# Altium PCB USB_receiver.PcbDoc
Units mm, origin at the board's own origin, x right, y up, seen from the top; angles counter-clockwise.
Board outline 18 x 44 mm, 2 copper layers (Top Layer, Bottom Layer); 49 components, 41 nets, 202 pads, 278 vias.
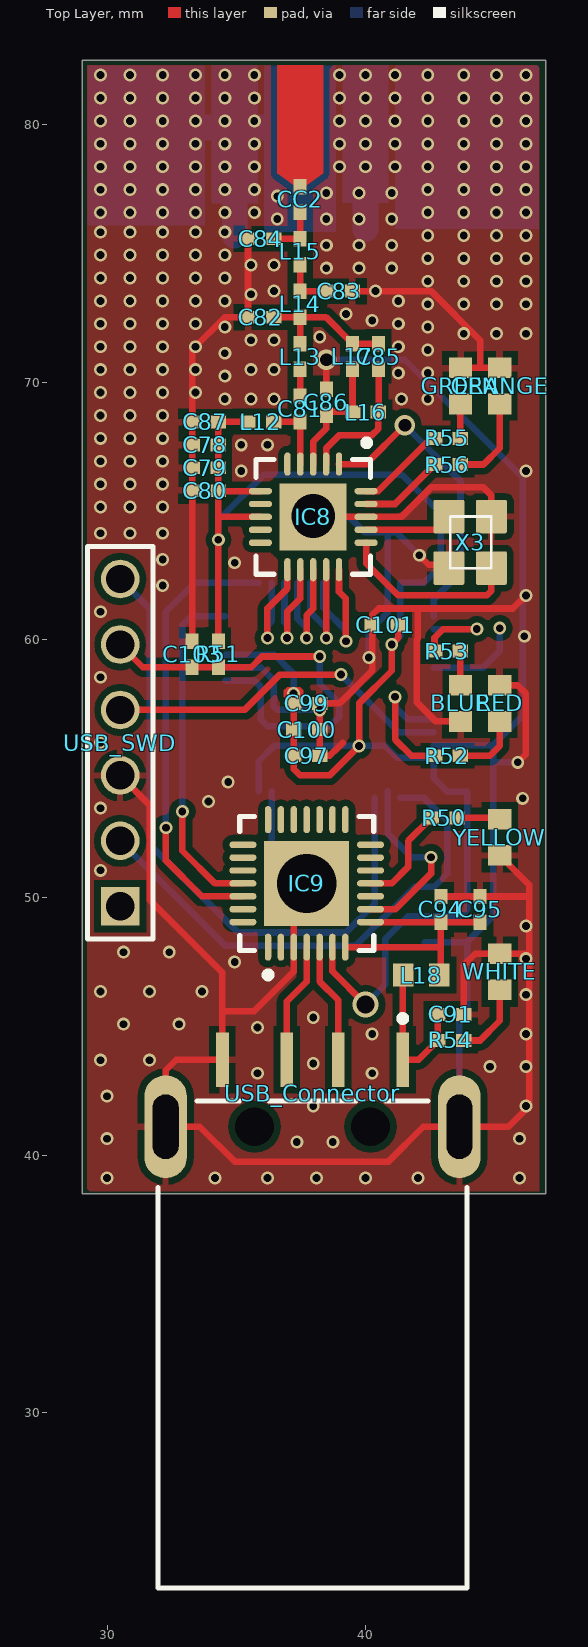
[diagram p0: Top Layer view]
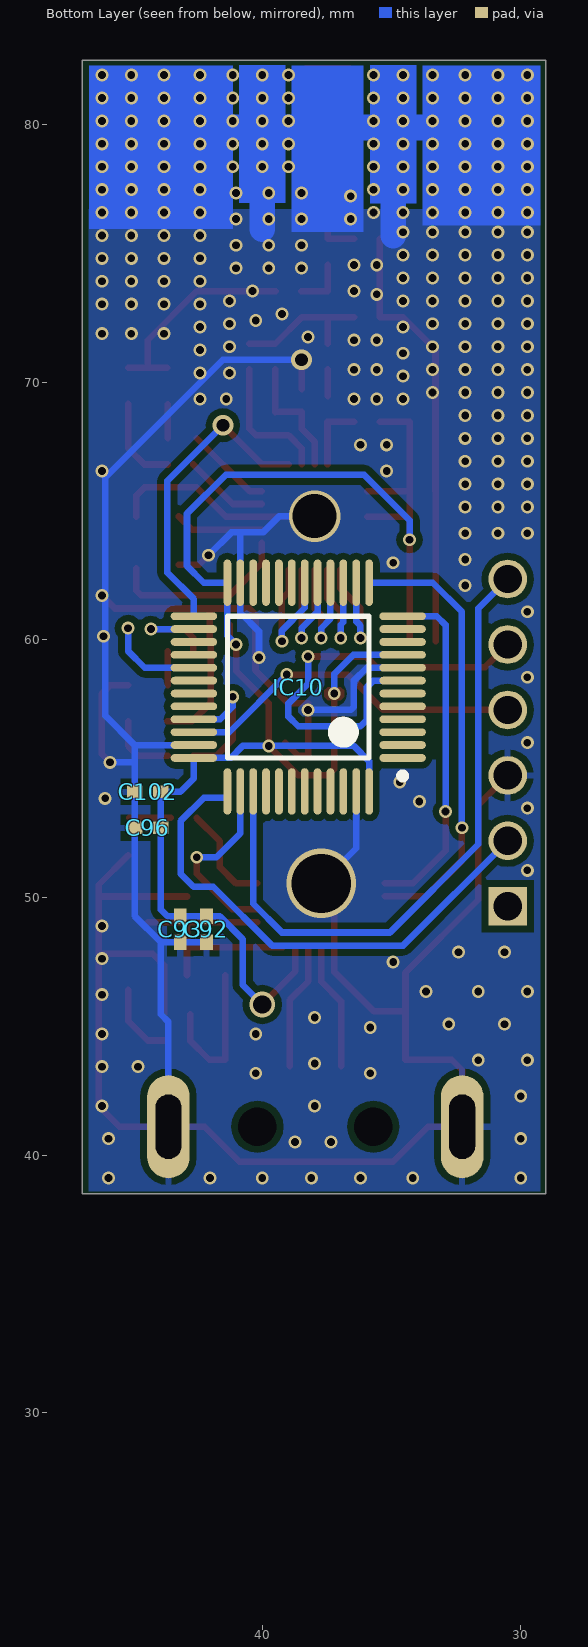
[diagram p1: Bottom Layer view, seen from below]

## Layer stack, top to bottom
Top Solder: solder mask 0.0102, Solder Resist, Dk 3.5
Top Layer: signal copper 0.0356
Dielectric 1: dielectric 0.32, FR-4, Dk 4.8
Bottom Layer: signal copper 0.0356
Bottom Solder: solder mask 0.0102, Solder Resist, Dk 3.5

## Board outline
29,38.5 29,82.5 47,82.5 47,38.5

## Design rules (kind name [scope] priority, off if disabled: settings)
Clearance [All] p1: gap=0.2
PlaneClearance [All] p1: clearance=0.254
PlaneConnect PlaneConnect_1 [All] p1: planeconnectstyle=Relief reliefexpansion=0.508 reliefentries=4 reliefconductorwidth=0.254 reliefairgap=0.254
PolygonConnect [IsVia AND InNet('GND2')] p1: connectstyle=Direct reliefconductorwidth=0.254 reliefentries=4 polygonreliefangle="90 Angle" airgapwidth=0.254
PolygonConnect PolygonConnect_1 [All] p2: connectstyle=Relief reliefconductorwidth=0.254 reliefentries=4 polygonreliefangle="90 Angle" airgapwidth=0.254
RoutingVias [All] p1: holewidth=0.711 width=1.27 viastyle="Through Hole" minholewidth=0.711 minwidth=1.27 maxholewidth=0.711 maxwidth=1.27
SolderMaskExpansion [All] p1: expansion=0.102
Width [All] p1: maxlimit=2 minlimit=0.254 preferedwidth=0.254 minimp=50.000000 maximp=50.000000 favimp=50.000000
28 further rules are at their usual default settings.

## Components (designator, comment, footprint, x,y, rotation, side; value= is the part's Value field where it differs from the comment)
BLUE "RED" 1608[0603] 43.688,57.531 r270 top
C78 "Cap" 0402 33.782,67.564 r0 top
C79 "Cap" 0402 33.782,66.675 r0 top
C80 "Cap" 0402 33.782,65.786 r0 top
C81 "Cap" 0402 37.465,68.961 r90 top
C82 "Cap" 0402 35.941,72.517 r180 top
C83 "Cap" 0402 38.989,73.533 r0 top
C84 "Cap" 0402 35.941,75.565 r180 top
C85 "Cap" 0402 40.513,70.993 r270 top
C86 "Cap" 0402 38.481,69.215 r270 top
C87 "Cap" 0402 33.782,68.453 r0 top
C91 "Cap" 0402 43.307,45.466 r180 top
C92 "Cap" 0402 42.172,48.768 r270 bottom
C93 "Cap" 0402 43.188,48.768 r270 bottom
C94 "Cap" 0402 42.926,49.538 r270 top
C95 "Cap" 0402 44.45,49.538 r270 top
C96 "Cap" 0402 44.45,52.705 r0 bottom
C97 "Cap" 0402 37.719,55.499 r0 top
C99 "Cap" 0402 37.719,57.531 r0 top
C100 "Cap" 0402 37.719,56.515 r0 top
C101 "Cap" 0402 40.767,60.579 r180 top
C102 "Cap" 0402 44.45,54.102 r0 bottom
C103 "Cap" 0402 33.274,59.436 r270 top
CC2 "Cap" 0402 37.465,77.089 r270 top
GREEN "RED" 1608[0603] 43.688,69.85 r90 top
IC8 "Si4461" QFN20_thermal_pad 1304.036,-1199.388 r270 top
IC9 "CP2102" RHD28_M 37.719,50.546 r90 top
IC10 "STM32F103_48pin" LQFP48 1294.892,-1202.309 r0 bottom
L12 "Inductor" 0402 35.941,68.453 r0 top
L13 "Inductor" 0402 37.465,70.993 r270 top
L14 "Inductor" 0402 37.465,73.025 r270 top
L15 "Inductor" 0402 37.465,75.057 r270 top
L16 "Inductor" 0402 40.005,68.834 r180 top
L17 "Inductor" 0402 39.497,70.993 r270 top
L18 "Ferrit bead" 1608[0603] 42.164,46.99 r180 top
ORANGE "RED" 1608[0603] 45.212,69.85 r90 top
R50 "Res1" 0402 43.053,53.086 r180 top
R51 "Res1" 0402 34.29,59.436 r270 top
R52 "Res1" 0402 43.18,55.499 r180 top
R53 "Res1" 0402 43.18,59.563 r180 top
R54 "Res1" 0402 43.307,44.45 r180 top
R55 "Res1" 0402 43.18,67.818 r180 top
R56 "Res1" 0402 43.18,66.802 r180 top
RED "RED" 1608[0603] 45.212,57.531 r90 top
USB_Connector "USB csatlakozó APA" USB_APA_SMD 1295.654,-1214.374 r270 top
USB_SWD "Tüskesor" HDR1X6 30.48,49.657 r90 top
WHITE "RED" 1608[0603] 45.212,47.117 r90 top
X3 "30 MHz" crystal_sx2520 1307.592,1328.801 r0 top
YELLOW "RED" 1608[0603] 45.212,52.332 r270 top

## Footprints (in the part's own frame and the unit in brackets; to place one, negate y for a bottom-side part, rotate by r counter-clockwise, add the part's x,y. Pads: shape width x height; smd on the part's side, far side on the other; paste and mask are expansions set on the pad)
0402 [mm] "Chip Capacitor, Body 1.0x0.5mm, IPC High Density"
  rect 0.6x0.5 smd: 1(-0.5,0) 2(0.5,0)
  body extent -0.55,-0.3 0.55,0.3, height 1.3
1608[0603] [mm] "Chip Capacitor, Body 1.6x0.8mm, IPC High Density"
  rect 0.8x0.9 smd: 1(-0.7,0) 2(0.7,0)
  body extent -0.87,-0.48 0.87,0.48, height 1.3
crystal_sx2520 [mm] "4_pin"
  rrect10% 1.2x1.3 smd mask+0.3: 1(-1262.705,-1266.017) 2(-1262.705,-1264.017) 3(-1264.355,-1264.017) 4(-1264.355,-1266.017)
  silkscreen extent -1264.3,-1266.02 -1262.71,-1264.02
HDR1X6 [mm] "Connector; Header; 6 Position"
  rect 1.5x1.5 hole 1.1: 1(0,0)
  round 1.5 hole 1.1: 2(2.54,0) 3(5.08,0) 4(7.62,0) 5(10.16,0) 6(12.7,0)
  silkscreen extent -1.27,-1.27 13.97,1.27
LQFP48 [mm]
  oval 1.8x0.3 smd: 1(-1260.334,-1257.725) 2(-1260.334,-1258.225) 3(-1260.334,-1258.725) 4(-1260.334,-1259.225) 5(-1260.334,-1259.725) 6(-1260.334,-1260.225) 7(-1260.334,-1260.725) 8(-1260.334,-1261.225) 9(-1260.334,-1261.725) 10(-1260.334,-1262.225) 11(-1260.334,-1262.725) 12(-1260.334,-1263.225) 25(-1252.234,-1263.225) 26(-1252.234,-1262.725) 27(-1252.234,-1262.225) 28(-1252.234,-1261.725) 29(-1252.234,-1261.225) 30(-1252.234,-1260.725) 31(-1252.234,-1260.225) 32(-1252.234,-1259.725) 33(-1252.234,-1259.225) 34(-1252.234,-1258.725) 35(-1252.234,-1258.225) 36(-1252.234,-1257.725)
  oval 0.3x1.8 smd: 13(-1259.034,-1264.525) 14(-1258.534,-1264.525) 15(-1258.034,-1264.525) 16(-1257.534,-1264.525) 17(-1257.034,-1264.525) 18(-1256.534,-1264.525) 19(-1256.034,-1264.525) 20(-1255.534,-1264.525) 21(-1255.034,-1264.525) 22(-1254.534,-1264.525) 23(-1254.034,-1264.525) 24(-1253.534,-1264.525) 37(-1253.534,-1256.425) 38(-1254.034,-1256.425) 39(-1254.534,-1256.425) 40(-1255.034,-1256.425) 41(-1255.534,-1256.425) 42(-1256.034,-1256.425) 43(-1256.534,-1256.425) 44(-1257.034,-1256.425) 45(-1257.534,-1256.425) 46(-1258.034,-1256.425) 47(-1258.534,-1256.425) 48(-1259.034,-1256.425)
  silkscreen extent -1260.46,-1263.22 -1253.53,-1256.9, body extent -1259.78,-1263.98 -1252.78,-1256.97, height 1.6
QFN20_thermal_pad [mm]
  oval 0.9x0.25 smd: 1(-1266.208,-1265.063) 2(-1266.208,-1265.563) 3(-1266.208,-1266.063) 4(-1266.208,-1266.563) 5(-1266.208,-1267.063) 11(-1262.108,-1267.063) 12(-1262.108,-1266.563) 13(-1262.108,-1266.063) 14(-1262.108,-1265.563) 15(-1262.108,-1265.063)
  oval 0.25x0.9 smd: 6(-1265.158,-1268.113) 7(-1264.658,-1268.113) 8(-1264.158,-1268.113) 9(-1263.658,-1268.113) 10(-1263.158,-1268.113) 16(-1263.158,-1264.013) 17(-1263.658,-1264.013) 18(-1264.158,-1264.013) 19(-1264.658,-1264.013) 20(-1265.158,-1264.013)
  rect 2.6x2.6 smd: 21(-1264.158,-1266.063)
  silkscreen extent -1267.16,-1268.29 -1261.93,-1263.84, body extent -1266.23,-1268.14 -1262.08,-1263.99, height 1
RHD28_M [mm] "28-Pin Plastic Quad Flat No-Lead 0.5 mm Pitch, IPC Low Density"
  oval 1.05x0.25 smd: 1(-2.475,1.5) 2(-2.475,1) 3(-2.475,0.5) 4(-2.475,0) 5(-2.475,-0.5) 6(-2.475,-1) 7(-2.475,-1.5) 15(2.475,-1.5) 16(2.475,-1) 17(2.475,-0.5) 18(2.475,0) 19(2.475,0.5) 20(2.475,1) 21(2.475,1.5)
  oval 0.25x1.05 smd: 8(-1.5,-2.475) 9(-1,-2.475) 10(-0.5,-2.475) 11(0,-2.475) 12(0.5,-2.475) 13(1,-2.475) 14(1.5,-2.475) 22(1.5,2.475) 23(1,2.475) 24(0.5,2.475) 25(0,2.475) 26(-0.5,2.475) 27(-1,2.475) 28(-1.5,2.475)
  rect 3.3x3.3 smd: 29(0,0)
  silkscreen extent -3.67,-2.6 2.6,2.6, body extent -2.58,-2.58 2.58,2.58, height 1
USB_APA_SMD [mm]
  rect 2.1x0.5 smd: 1(-1258.077,-1254.208) 2(-1258.077,-1256.708) 3(-1258.077,-1258.708) 4(-1258.077,-1261.208)
  oval 4x1.65 hole 1 slot 2.5 at 0 deg: 5(-1255.477,-1263.408) 6(-1255.477,-1252.008)
  round 1.2 hole 1.5 unplated: MH1(-1255.477,-1259.958) MH2(-1255.477,-1255.458)
  silkscreen extent -1259.8,-1263.71 -1237.58,-1251.71, body extent -1256.48,-1263.71 -1237.58,-1251.71, height 4.5

## Part data
BLUE GREEN ORANGE RED WHITE YELLOW: library part LED0, "Typical INFRARED GaAs LED"
C78 C79 C80 C81 C82 C83 C84 C85 C86 C87 C91 C92 C93 C94 C95 C96 C97 C99 C100 C101 C102 C103 CC2: "Capacitor"
L18: library part Inductor, "Inductor"
R50 R51 R52 R53 R54 R55 R56: "Resistor"
USB_Connector USB_SWD: library part "Header 6", "Header, 6-Pin"
X3: library part XTAL, "Crystal Oscillator"

## Via types
v1: diameter 0.5, hole 0.3, Top Layer to Bottom Layer, tented both sides, 273 vias
v2: diameter 0.8, hole 0.5, Top Layer to Bottom Layer, tented both sides, 2 vias
v3: diameter 1, hole 0.7, Top Layer to Bottom Layer, tented both sides, 1 vias
v4: diameter 2, hole 1.7, Top Layer to Bottom Layer, tented top, 1 vias
v5: diameter 2.7, hole 2.3, Top Layer to Bottom Layer, tented top, 1 vias

## Nets (pads, with @x,y where several pads share a name; then routed paths per layer and width w, separated by ;. In a path a pad name is that pad's centre, name@x,y a point inside that pad or via, vN(x,y) a via of type N, cw(c..) or ccw(c..) an arc to the next point about the centre after c; other vN are vias at no path point)
3V3_USB_RADIO: C78.2 C79.2 C80.2 C87.2 C92.1 C93.1 C96.1 C97.1 C99.1 C100.1 C101.1 C102.1 IC8.6 IC8.8 IC9.6 IC10.9 IC10.24 IC10.36 IC10.48 L12.1 R51.1 | length 69.8
  Top Layer w0.254: v1@34.282,63.889 34.282,64.77 ; R51.1 v1(34.29,63.881) ; L12.1 C87.2 C78.2 C79.2 C80.2 C80.2@34.282,65.77 ; IC8.8 34.282,64.77 ; IC8.6 C80.2@34.282,65.77 ; v1@37.219,57.912 C99.1 C100.1 C97.1 37.219,54.983 37.465,54.737 38.608,54.737 v1(39.751,55.88) 39.751,57.531 41.021,58.801 v1(41.021,59.817) 41.275,60.071 41.275,60.571 C101.1 ; IC9.6 38.719,47.133 v3(40.005,45.847) ; 34.282,64.77 C80.2@34.282,65.77
  Bottom Layer w0.254: v1(34.29,63.881) 34.29,64.643 36.045,66.398 41.425,66.398 42.926,64.897 42.926,62.865 42.277,62.216 IC10.24 41.358,60.154 v1(41.021,59.817) ; IC10.9 36.469,59.416 37.211,58.674 v1(37.211,57.912) ; IC10.48 35.858,55.289 36.449,55.88 v1(39.751,55.88) 40.767,55.88 41.231,55.416 IC10.36 42.658,54.624 43.18,54.102 C102.1 ; v3(40.005,45.847) 40.767,46.609 40.767,48.387 41.648,49.268 C92.1 ; C92.1@42.148,49.268 43.68,49.268 43.942,49.53 C102.1@43.942,54.102
5V: C91.2 L18.2 R54.2 USB_Connector.1 | length 6
  Top Layer w0.254: L18.2@41.446,46.99 USB_Connector.1 42.06,43.703 R54.2 C91.2
GND2: BLUE.2 C78.1 C79.1 C80.1 C82.2 C83.2 C84.2 C86.1 C87.1 C91.1 C92.2 C93.2 C94.1 C95.1 C96.2 C97.2 C99.2 C100.2 C101.2 C102.2 C103.1 GREEN.2 IC8.18 IC8.21 IC9.3 IC9.29 IC10.8 IC10.23 IC10.35 IC10.47 ORANGE.2 RED.2 USB_Connector.4 USB_Connector.5 USB_Connector.6 USB_SWD.3 WHITE.2 X3.2 X3.4 YELLOW.2 | length 196.2
  Top Layer w0.254: USB_SWD.3 31.623,53.594 31.623,49.911 34.446,47.088 34.446,45.593 ; C103.1 33.274,65.778 C80.1 C79.1 C78.1 C87.1 33.282,71.255 34.544,72.517 C82.2 C84.2 ; IC9.29@37.846,50.808 37.846,50.546 37.219,49.919 IC9.3 37.219,47.125 35.687,45.593 34.446,45.593 ; IC8.21 41.402,64.77 42.545,65.913 44.577,65.913 44.887,65.603 X3.2 ; C100.2 C97.2 38.608,55.499 39.116,56.007 ; C100.2@38.219,56.642 C99.2 38.989,57.531 40.267,58.809 C101.2 40.267,60.968 40.513,61.214 42.037,61.214 ; C86.1 v2(38.481,70.866) ; C83.2 42.545,73.533 44.45,71.628 44.45,70.55 ; v1(42.091,63.28) 42.46,62.911 X3.4@43.237,62.911 ; C94.1 C95.1 46.351,50.038 ; BLUE.2 42.737,56.831 41.999,57.569 41.999,60.009 42.037,60.047 42.037,61.214 ; GREEN.2 ORANGE.2 ; C91.1 43.807,47.363 44.261,47.817 WHITE.2 v1@46.289,47.817 ; YELLOW.2 46.351,50.493 46.351,50.038 ; RED.2 45.909,58.231 46.228,57.912 46.228,55.561 v1(45.912,55.245) ; v1(46.228,61.722) 45.72,61.214 42.037,61.214 ; v1@46.351,41.91 46.351,50.038 ; v1@46.353,41.908 45.548,41.103 USB_Connector.6 42.246,41.103 40.894,39.751 34.925,39.751 33.573,41.103 USB_Connector.5 32.246,43.295 32.654,43.703 USB_Connector.4 34.446,45.593
  Bottom Layer w0.254: IC10.8 35.953,58.916 36.449,58.42 36.449,57.404 36.576,57.277 v1(38.227,57.277) ; IC10.47 36.358,51.907 v5(37.719,50.546) ; v4(37.973,64.8) 39.34,64.8 39.971,64.169 40.858,64.169 ; v2(38.481,70.866) 41.529,70.866 46.101,66.294 46.101,57.059 44.958,55.916 ; v1(40.132,59.309) 40.132,60.325 40.858,61.051 IC10.23 40.858,64.169 ; v1(42.091,63.28) 41.202,64.169 40.858,64.169 ; C92.2@42.299,48.268 C93.2 43.942,48.268 ; IC10.35 44.958,55.916 ; USB_Connector.6@43.646,42.5 43.646,45.17 43.942,45.466 43.942,48.268 ; v1(45.912,55.245) 44.958,55.245 ; 43.942,48.268 44.958,49.284 44.958,55.245 ; 44.958,55.245 44.958,55.916
  Bottom Layer w1: 31.877,79.883 34.925,79.883 ; 34.925,75.692 34.925,79.883 ; 40.005,75.946 40.005,79.883 ; 43.561,79.883 40.005,79.883 ; 34.925,79.883 40.005,79.883
  other v1: 29.972,39.116 34.163,39.116 36.195,39.116 38.1,39.116 40.005,39.116 42.037,39.116 45.974,39.116 37.338,40.513 38.735,40.513 29.972,40.64 45.974,40.64 37.973,41.91 46.228,41.91 29.972,42.291 35.814,43.18 40.259,43.18 44.831,43.434 46.228,43.434 37.973,43.561 29.718,43.688 31.623,43.688 40.259,44.704 46.228,44.704 35.814,44.958 30.607,45.085 32.766,45.085 37.973,45.339 46.228,46.228 29.718,46.355 31.623,46.355 33.655,46.355 34.925,47.498 46.228,47.625 30.607,47.879 32.385,47.879 46.228,48.895 29.718,51.054 29.718,53.467 33.909,53.721 46.101,53.848 34.671,54.483 29.718,56.007 29.718,58.547 46.166,60.136 29.718,61.087 32.131,62.103 34.925,62.992 32.131,63.119 29.718,64.135 30.861,64.135 32.131,64.135 29.718,65.151 30.861,65.151 32.131,65.151 29.718,66.04 30.861,66.04 32.131,66.04 35.179,66.548 46.228,66.548 29.718,66.929 30.861,66.929 32.131,66.929 35.179,67.564 36.195,67.564 29.718,67.818 30.861,67.818 32.131,67.818 29.718,68.707 30.861,68.707 32.131,68.707 34.544,69.342 35.56,69.342 36.449,69.342 41.402,69.342 42.418,69.342 29.718,69.596 30.861,69.596 32.131,69.596 33.401,69.596 34.544,70.231 41.275,70.358 42.418,70.358 29.718,70.485 30.861,70.485 32.131,70.485 33.401,70.485 35.56,70.485 36.449,70.485 34.544,71.12 42.418,71.247 29.718,71.374 30.861,71.374 32.131,71.374 33.401,71.374 41.275,71.374 35.56,71.628 36.449,71.628 38.227,71.755 43.815,71.882 45.085,71.882 46.228,71.882 34.544,72.136 42.418,72.136 29.718,72.263 30.861,72.263 32.131,72.263 33.401,72.263 41.275,72.263 40.259,72.39 39.243,72.644 42.418,73.025 43.815,73.025 45.085,73.025 46.228,73.025 29.718,73.152 30.861,73.152 32.131,73.152 33.401,73.152 34.544,73.152 41.275,73.152 35.56,73.406 36.449,73.533 40.386,73.533 42.418,73.914 43.815,73.914 45.085,73.914 46.228,73.914 29.718,74.041 30.861,74.041 32.131,74.041 33.401,74.041 34.544,74.041 38.481,74.422 39.751,74.422 41.021,74.422 35.56,74.549 36.449,74.549 42.418,74.803 43.815,74.803 45.085,74.803 46.228,74.803 29.718,74.93 30.861,74.93 32.131,74.93 33.401,74.93 34.544,74.93 38.481,75.311 39.751,75.311 41.021,75.311 42.418,75.692 43.815,75.692 45.085,75.692 46.228,75.692 29.718,75.819 30.861,75.819 32.131,75.819 33.401,75.819 34.544,75.819 36.576,76.327 38.481,76.327 39.751,76.327 41.021,76.327 29.718,76.581 30.861,76.581 32.131,76.581 33.401,76.581 34.544,76.581 35.687,76.581 42.418,76.581 43.815,76.581 45.085,76.581 46.228,76.581 36.576,77.216 38.481,77.343 39.751,77.343 41.021,77.343 29.718,77.47 30.861,77.47 32.131,77.47 33.401,77.47 34.544,77.47 35.687,77.47 42.418,77.47 43.815,77.47 45.085,77.47 46.228,77.47 29.718,78.359 30.861,78.359 32.131,78.359 33.401,78.359 34.544,78.359 35.687,78.359 38.989,78.359 40.005,78.359 41.148,78.359 42.418,78.359 43.815,78.359 45.085,78.359 46.228,78.359 29.718,79.248 30.861,79.248 32.131,79.248 33.401,79.248 34.544,79.248 35.687,79.248 38.989,79.248 40.005,79.248 41.148,79.248 42.418,79.248 43.815,79.248 45.085,79.248 46.228,79.248 29.718,80.137 30.861,80.137 32.131,80.137 33.401,80.137 34.544,80.137 35.687,80.137 38.989,80.137 40.005,80.137 41.148,80.137 42.418,80.137 43.815,80.137 45.085,80.137 46.228,80.137 29.718,81.026 30.861,81.026 32.131,81.026 33.401,81.026 34.544,81.026 35.687,81.026 38.989,81.026 40.005,81.026 41.148,81.026 42.418,81.026 43.815,81.026 45.085,81.026 46.228,81.026 29.718,81.915 30.861,81.915 32.131,81.915 33.401,81.915 34.544,81.915 35.687,81.915 38.989,81.915 40.005,81.915 41.148,81.915 42.418,81.915 43.815,81.915 45.085,81.915 46.228,81.915
MCO: IC10.29 | length 3.7
  Bottom Layer w0.254: IC10.29 44.565,58.916 45.212,59.563 v1(45.212,60.452)
NetBLUE_1: BLUE.1 R53.1 | length 1.3
  Top Layer w0.254: BLUE.1@43.68,58.239 R53.1
NetC81_1: C81.1 IC8.4 L12.2 | length 2.7
  Top Layer w0.254: L12.2 37.473,68.453 IC8.4
NetC81_2: C81.2 L13.2 | length 1
  Top Layer w0.254: C81.2 L13.2
NetC82_1: C82.1 C85.1 L13.1 L14.2 L17.1 | length 5.5
  Top Layer w0.254: C82.1 L14.2@37.457,72.517 ; L13.1 L14.2 38.465,72.525 L17.1 C85.1
NetC83_1: C83.1 L14.1 L15.2 | length 2
  Top Layer w0.254: L14.1 L15.2 ; L14.1@37.473,73.533 C83.1
NetC84_1: C84.1 CC2.2 L15.1 | length 2
  Top Layer w0.254: C84.1 L15.1@37.457,75.565 ; L15.1@37.465,75.573 CC2.2
NetC85_2: C85.2 IC8.2 L16.1 | length 5.3
  Top Layer w0.254: IC8.2 38.473,67.429 38.989,67.945 40.259,67.945 40.505,68.191 L16.1 ; L16.1@40.513,68.842 C85.2
NetC86_2: C86.2 IC8.3 L16.2 L17.2 | length 4.9
  Top Layer w0.254: IC8.3 37.973,67.691 38.481,68.199 38.481,68.842 L16.2@39.497,68.842 ; L17.2 L16.2@39.497,68.842 ; L16.2 L16.2@39.497,68.842
NetC94_2: C94.2 C95.2 IC9.7 IC9.8 L18.1 | length 10.1
  Top Layer w0.254: IC9.7 42.926,48.071 ; IC9.8 C94.2@43.045,49.046 ; L18.1@42.926,46.99 42.926,48.071 ; C95.2 C94.2 42.926,48.071
NetC103_2: C103.2 IC10.7 R51.2 USB_SWD.5 | length 17
  Top Layer w0.254: USB_SWD.5 31.361,58.936 C103.2 R51.2 35.568,58.936 35.983,59.351 v1(38.227,59.351)
  Bottom Layer w0.254: IC10.7 35.691,58.416 35.941,58.166 35.941,56.896 36.195,56.642 38.608,56.642 38.989,57.023 38.989,57.531 38.227,58.293 v1@38.227,59.309
NetCC2_1: CC2.1
NetGREEN_1: GREEN.1 R55.1 | length 1.3
  Top Layer w0.254: R55.1 GREEN.1@43.68,69.142
NetIC8_1: IC8.1 IC10.25 | length 11.9
  Top Layer w0.254: IC8.1 40.023,66.82 v2(41.529,68.326)
  Bottom Layer w0.254: v2(41.529,68.326) 43.688,66.167 43.688,62.611 42.658,61.581 IC10.25
NetIC8_11: IC8.11 IC10.14 | length 5.7
  Top Layer w0.254: v1(36.195,60.071) 36.195,61.214 36.973,61.992 IC8.11
  Bottom Layer w0.254: v1(36.195,60.071) 36.195,60.551 36.35,60.706 36.35,61.207 ; 36.358,60.714 IC10.14
NetIC8_12: IC8.12 IC10.15 | length 5
  Top Layer w0.254: v1(36.957,60.071) 36.957,61.087 37.473,61.603 IC8.12
  Bottom Layer w0.254: IC10.15 36.858,60.678 36.957,60.579 v1(36.957,60.071)
NetIC8_13: IC8.13 IC10.16 | length 5
  Top Layer w0.254: v1(37.719,60.071) 37.719,60.96 37.973,61.214 IC8.13
  Bottom Layer w0.254: IC10.16 37.358,60.813 37.719,60.452 v1(37.719,60.071)
NetIC8_14: IC8.14 IC10.17 | length 5
  Top Layer w0.254: v1@38.473,60.079 IC8.14
  Bottom Layer w0.254: IC10.17 37.858,61.075 38.481,60.452 v1(38.481,60.071)
NetIC8_15: IC8.15 IC10.18 | length 5.5
  Top Layer w0.254: IC8.15 38.973,61.865 39.243,61.595 v1(39.243,59.944)
  Bottom Layer w0.254: IC10.18 38.358,61.242 39.243,60.357 v1(39.243,59.944)
NetIC8_16: IC8.16 X3.1 | length 7.1
  Top Layer w0.254: IC8.16 40.023,62.974 41.275,61.722 44.704,61.722 44.887,61.905 X3.1
NetIC8_17: IC8.17 X3.3 | length 3.4
  Top Layer w0.254: IC8.17 42.723,64.27 X3.3
NetIC8_19: IC8.19 R56.2 | length 3.3
  Top Layer w0.254: IC8.19 41.148,65.27 R56.2
NetIC8_20: IC8.20 R55.2 | length 3.4
  Top Layer w0.254: IC8.20 40.497,65.77 R55.2@42.545,67.818
NetIC9_4: IC9.4 USB_Connector.3 | length 4.9
  Top Layer w0.254: USB_Connector.3@36.946,43.449 36.946,45.963 37.719,46.736 IC9.4
NetIC9_5: IC9.5 USB_Connector.2 | length 4.9
  Top Layer w0.254: IC9.5 38.219,46.744 38.946,46.017 USB_Connector.2@38.946,43.449
NetIC9_9: IC9.9 IC10.38 | length 7.3
  Top Layer w0.254: IC9.9 41.164,49.546 42.545,50.927 v1(42.545,51.562)
  Bottom Layer w0.254: IC10.38 40.858,52.487 41.783,51.562 v1(42.545,51.562)
NetIC9_11: IC9.11 R50.2 | length 4
  Top Layer w0.254: IC9.11 41.021,50.546 41.656,51.181 41.656,52.189 R50.2
NetIC9_25: IC9.25 IC10.12 | length 13.4
  Top Layer w0.254: v1(32.893,53.34) 32.893,51.816 34.163,50.546 IC9.25
  Bottom Layer w0.254: v1(32.893,53.34) 32.893,60.579 33.23,60.916 IC10.12
NetIC9_26: IC9.26 IC10.13 | length 17.3
  Top Layer w0.254: v1(32.258,52.705) 32.258,51.435 33.647,50.046 IC9.26
  Bottom Layer w0.254: v1(32.258,52.705) 32.258,61.087 33.387,62.216 IC10.13
NetIC10_26: IC10.26 R53.2 | length 4
  Top Layer w0.254: R53.2 42.68,60.079 43.017,60.416 v1(44.323,60.416)
  Bottom Layer w0.254: IC10.26 v1(44.323,60.416)
NetIC10_33: IC10.33 R52.2 | length 5.5
  Top Layer w0.254: v1(41.148,57.785) 41.148,56.134 41.783,55.499 R52.2
  Bottom Layer w0.254: v1(41.148,57.785) 41.148,57.404 41.636,56.916 IC10.33
NetIC10_34: IC10.34 USB_SWD.4 | length 13.7
  Top Layer w0.254: USB_SWD.4 35.306,57.277 36.68,58.651 v1(39.052,58.651)
  Bottom Layer w0.254: v1(39.052,58.651) 41.287,56.416 IC10.34
NetIC10_37: IC10.37 USB_SWD.2 | length 19.8
  Bottom Layer w0.254: USB_SWD.2 34.544,48.133 39.624,48.133 41.91,50.419 42.672,50.419 43.176,50.923 43.176,52.963 42.277,53.862 IC10.37@41.358,53.862
NetIC10_39: IC10.39 USB_SWD.6 | length 25.5
  Bottom Layer w0.254: USB_SWD.6 31.623,61.214 31.623,52.07 35.052,48.641 39.243,48.641 40.358,49.756 IC10.39@40.358,53.862
NetORANGE_1: ORANGE.1 R56.1 | length 3.5
  Top Layer w0.254: R56.1 44.577,66.802 45.212,67.437 ORANGE.1
NetR50_1: R50.1 YELLOW.1 | length 1.6
  Top Layer w0.254: R50.1 YELLOW.1@45.158,53.086
NetR52_1: R52.1 RED.1 | length 2.6
  Top Layer w0.254: R52.1 44.831,55.499 45.212,55.88 RED.1
NetR54_1: R54.1 WHITE.1 | length 2.9
  Top Layer w0.254: R54.1 44.45,44.45 45.212,45.212 WHITE.1
pads on no net: IC8.5 IC8.7 IC8.9 IC8.10 IC9.1 IC9.2 IC9.10 IC9.12 IC9.13 IC9.14 IC9.15 IC9.16 IC9.17 IC9.18 IC9.19 IC9.20 IC9.21 IC9.22 IC9.23 IC9.24 IC9.27 IC9.28 IC10.1 IC10.2 IC10.3 IC10.4 IC10.5 IC10.6 IC10.10 IC10.11 IC10.19 IC10.20 IC10.21 IC10.22 IC10.27 IC10.28 IC10.30 IC10.31 IC10.32 IC10.40 IC10.41 IC10.42 IC10.43 IC10.44 IC10.45 IC10.46 USB_Connector.MH1 USB_Connector.MH2 USB_SWD.1

## Polygon pours and split planes (outlines as drawn)
GND2 on Top Layer "Top Layer-No Net 1" (solid, remove dead copper, pour order 2): 29.21,82.296 46.736,82.296 46.736,38.608 29.21,38.608
GND2 on Bottom Layer "Top Layer-No Net 1" (solid, remove dead copper, pour order 4): 29.21,76.708 46.736,76.708 46.736,38.608 29.21,38.608

## Other copper
Top Layer:
  region net 3V3_USB_RADIO: 36.957,57.658 36.83,57.785 36.83,58.039 36.957,58.166 37.465,58.166 37.592,58.039 37.592,57.785 37.465,57.658
  region net NetCC2_1: 37.465,77.462 36.576,78.105 36.576,82.296 38.354,82.296 38.354,78.105
Bottom Layer:
  rectangle net GND2: 29.21,76.073 33.782,82.296
  rectangle net GND2: 36.068,75.819 38.862,82.296
  rectangle net GND2: 41.148,75.946 46.736,82.296
  region net GND2: 35.814,76.946 34.036,76.946 34.036,82.296 35.814,82.296
  region net GND2: 40.894,76.962 39.116,76.962 39.116,82.296 40.894,82.296

## Silkscreen, mask and mechanical layers (free items; w line width, h text height)
Top Solder:
  region: 36.576,78.486 36.576,82.296 38.354,82.296 38.354,78.486
Bottom Solder:
  region: 35.814,76.946 34.036,76.946 34.036,82.296 35.814,82.296
  region: 40.894,76.946 39.116,76.946 39.116,82.296 40.894,82.296
Mechanical 1:
  the board outline again, w0.254

## Text inside footprints (layer, text, board x,y; h text height)
USB_Connector: Mechanical 1 "PCB Edge" at 32.773,37.93 h0.25